# EAGLE board MovuinoHealthBandV0.2.7.4-2 (EAGLE 9.6.2)
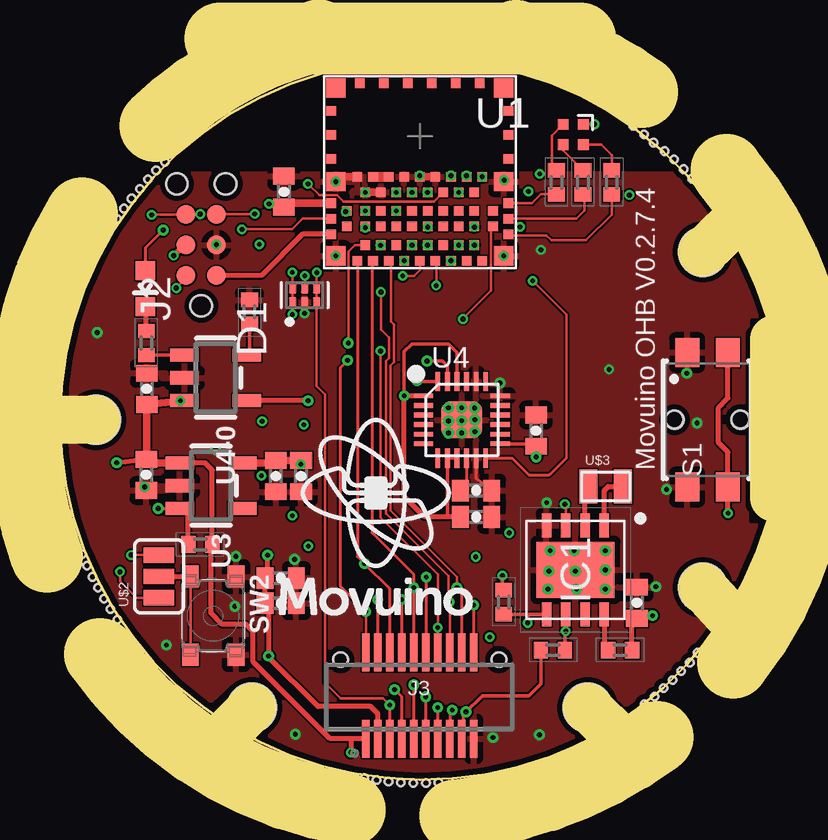
[diagram p0: board, top side]
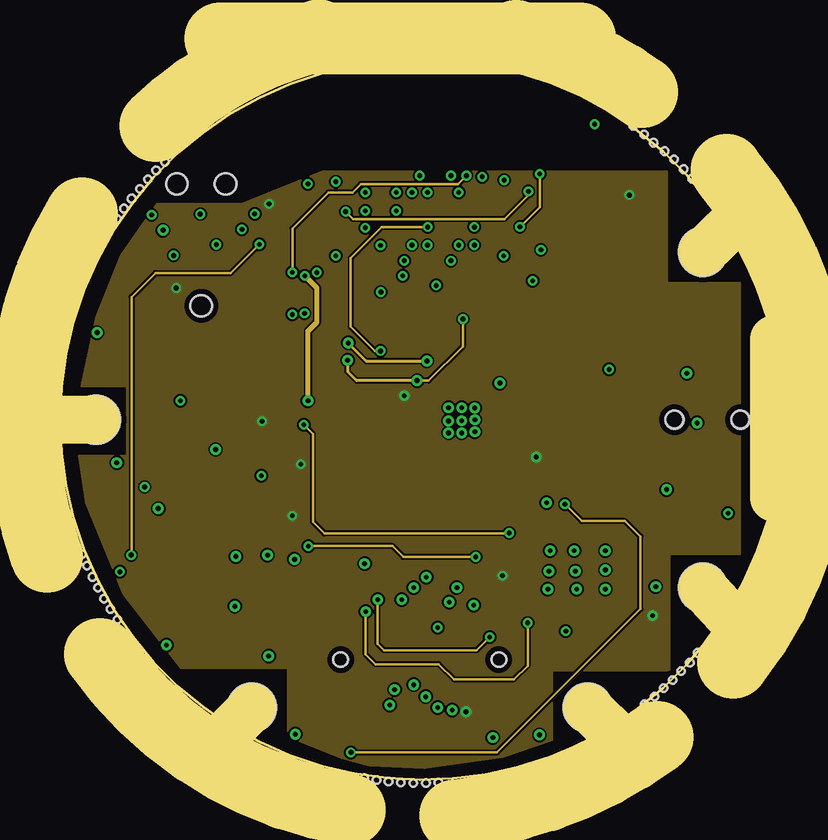
[diagram p1: board, inner layer VCC]
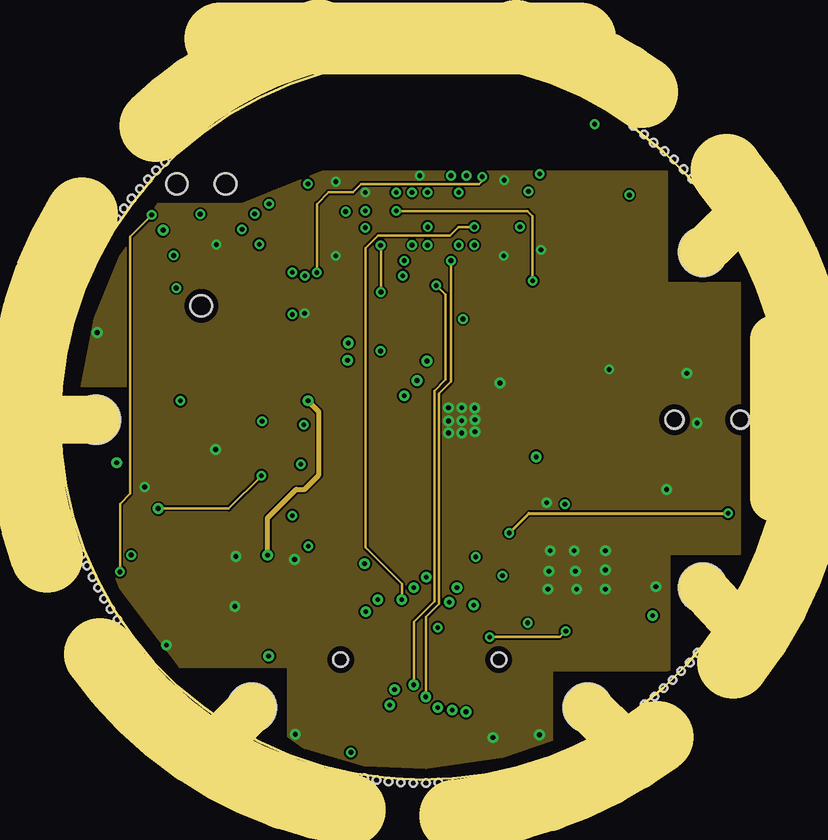
[diagram p2: board, inner layer GND]
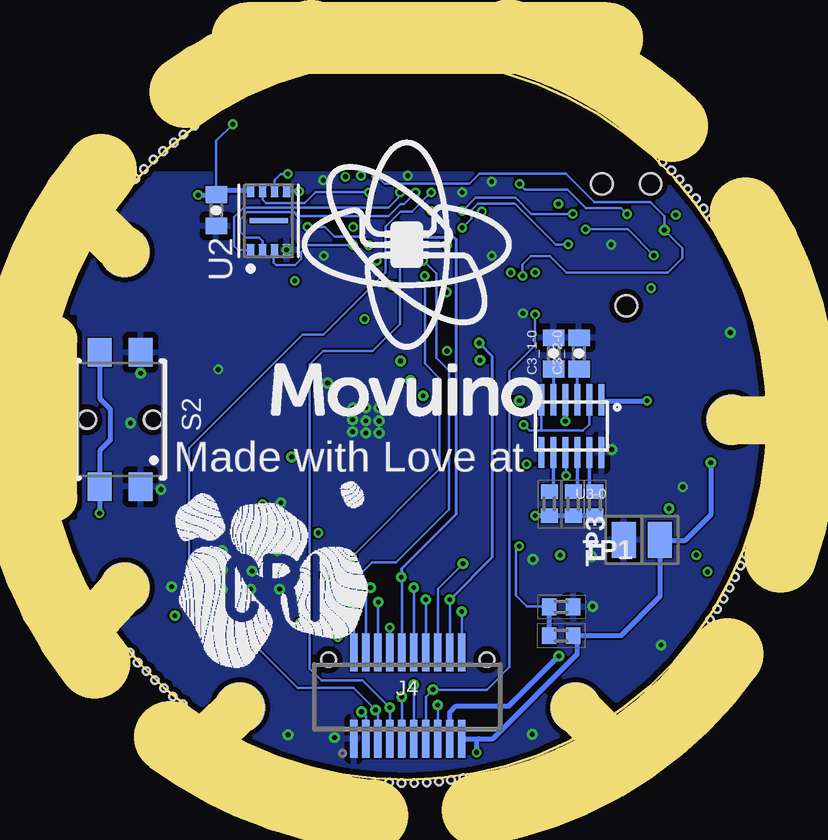
[diagram p3: board, bottom side, seen from below]

Size 29.5 x 30 mm. Coordinates in mm from the lower left corner, seen from the top.
Outline: 28.88,11.42 28.88,18.58 29.5,19.2 arc75 15,30 arc90 0,15 arc90 15,0 arc75 29.5,10.8 28.88,11.42
Copper layers (1*2*15*16): Top 0.035mm / dielectric 0.3mm / VCC 0.0175mm / dielectric 0.3mm / GND 0.0175mm / dielectric 0.3mm / Bottom 0.035mm
Design rules "PCBWAY_4layer_3mil-drill0.2-1mm": minimum track width 3mil, minimum drill 0.2mm, track to track 3mil, track to pad 3mil, pad to pad 3mil, via to via 3mil, smd to smd 0mil, copper to edge 10mil, drill to drill 8mil, minimum pad ring 6mil, minimum via ring 4mil, stop-mask expansion 4mil, vias tented up to drill 25mil, thermal gap 10mil
Net classes: 1 pcbway_3mil: width 0.076 mm, drill 0.15 mm, clearance 0.076 mm; 2 pcbway_cheap: width 0.152 mm, drill 0.3 mm, clearance 0.152 mm; 3 pcbway_5mil: width 0.127 mm, drill 0.25 mm, clearance 0.127 mm; 4 pcbway_4mil: width 0.102 mm, drill 0.2 mm, clearance 0.102 mm; 5 EC-Class7-drill0.15: width 0.125 mm, drill 0.15 mm, clearance 0.125 mm; 6 JLCPCB: width 0.127 mm, drill 0.2 mm, clearance 0.127 mm
Holes 2 mm at 1.5,15 26.8,22 26.8,8 8,3 22,3
Holes 0.3 mm at 23.9,27.25 24.35,26.9 24.75,26.55 25.2,26.2 25.6,25.85 26,25.45 26.35,25.05 12.69,0.07 13.2,-0.02 13.7,-0.08 14.21,-0.12 14.73,-0.14 15.26,-0.14 15.78,-0.12 0.92,9.4 1.13,8.91 1.35,8.45 1.59,8 1.83,7.55 2.11,7.1 2.39,6.66 2.38,23.37 2.67,23.8 2.99,24.22 3.34,24.63 3.66,25.02 4.01,25.39 4.37,25.76 24.37,3.14 24.79,3.46 25.16,3.81 25.54,4.15 25.9,4.52 26.26,4.88 26.59,5.28
tRestrict: area 28.8,11.8 to 30.6,19.2; area 28.8,10.8 to 30.5,18.1; area 4.1,25.4 to 26.6,31.1; 3 lines
bRestrict: area 28.9,10.9 to 30.6,19.3; area 4.1,25.4 to 28.3,31.1; 3 lines
Milling: 13 lines

## Footprints (pad centres in the part's own frame; a part is rotated, then mirrored left to right if it is on the bottom)
0402-CAP = smd 0.7 x 0.9: 1 -0.65,0; 2 0.65,0
SOT-886 = smd 0.42 x 0.31: 1 -0.29,0.5; 2 -0.29,0; 3 -0.29,-0.5; 4 0.29,-0.5; 5 0.29,0; 6 0.29,0.5
SON80P400X400X100-9N = smd 1 x 0.4: 1 -1.85,1.2; 2 -1.85,0.4; 3 -1.85,-0.4; 4 -1.85,-1.2; 5 1.85,-1.2; 6 1.85,-0.4; 7 1.85,0.4; 8 1.85,1.2 | smd 2.35 x 3.25: 9 0,0
TC2030-MCP-NL = smd 0.787 x 0.787: 1 1.27,-0.635; 2 1.27,0.635; 3 2.54,-0.635; 4 2.54,0.635; 5 3.81,-0.635; 6 3.81,0.635 | hole 0.889: 0,0; 5.08,-1.016; 5.08,1.016
DF12-20-DS-NO_MF = smd 0.3 x 1.6: 1 -2.25,-1.8; 2 -2.25,1.8; 3 -1.75,-1.8; 4 -1.75,1.8; 5 -1.25,-1.8; 6 -1.25,1.8; 7 -0.75,-1.8; 8 -0.75,1.8; 9 -0.25,-1.8; 10 -0.25,1.8; 11 0.25,-1.8; 12 0.25,1.8; 13 0.75,-1.8; 14 0.75,1.8; 15 1.25,-1.8; 16 1.25,1.8; 17 1.75,-1.8; 18 1.75,1.8; 19 2.25,-1.8; 20 2.25,1.8 | hole 0.6: -3.3,1.5; 3.3,1.5
DF12-20-DP-NL-(5.0) = smd 0.3 x 1.6: 1 -2.25,-1.8; 2 -2.25,1.8; 3 -1.75,-1.8; 4 -1.75,1.8; 5 -1.25,-1.8; 6 -1.25,1.8; 7 -0.75,-1.8; 8 -0.75,1.8; 9 -0.25,-1.8; 10 -0.25,1.8; 11 0.25,-1.8; 12 0.25,1.8; 13 0.75,-1.8; 14 0.75,1.8; 15 1.25,-1.8; 16 1.25,1.8; 17 1.75,-1.8; 18 1.75,1.8; 19 2.25,-1.8; 20 2.25,1.8 | hole 0.6: -3.3,1.5; 3.3,1.5
LED-0603 = smd 0.8 x 0.8: A 0,-0.75; C 0,0.75
R0402-SMALL-TDOCU = smd 0.6 x 0.7: 1 -0.5,0; 2 0.5,0
4363X10458XX = smd 1.2 x 1: 1 2.8,0.85; 2 2.8,-0.85; 3 -2.8,0.85; 4 -2.8,-0.85 | hole 0.75: 0,1.375; 0,-1.375
BTN_KMT0 = smd 0.95 x 0.7: A -1.625,0.95; A' 1.625,0.95; B -1.625,-0.95; B' 1.625,-0.95
PAD-1X1.5_NOSILK = smd 1 x 1.5: P$1 0,0
ISP1807-LR = smd 0.8 x 0.8: 1 3.5,-5; 7 3.5,-1.9; 25 -3.5,-1.9; 31 -3.5,-5; 68 3.5,2; 75 -3.5,2 | smd 0.4 x 0.4: 2 3.7,-4.1; 3 3.05,-3.775; 4 3.7,-3.45; 5 3.05,-3.125; 6 3.7,-2.8; 8 2.6,-1.7; 9 2.275,-2.35; 10 1.95,-1.7; 11 1.625,-2.35; 12 1.3,-1.7; 13 0.975,-2.35; 14 0.65,-1.7; 15 0.325,-2.35; 16 0,-1.7; 17 -0.325,-2.35; 18 -0.65,-1.7; 19 -0.975,-2.35; 20 -1.3,-1.7; 21 -1.625,-2.35; 22 -1.95,-1.7; 23 -2.275,-2.35; 24 -2.6,-1.7; 26 -3.7,-2.8; 27 -3.05,-3.125; 28 -3.7,-3.45; 29 -3.05,-3.775; 30 -3.7,-4.1; 32 -2.6,-5.2; 33 -2.275,-4.55; 34 -1.95,-5.2; 35 -1.625,-4.55; 36 -1.3,-5.2; 37 -0.975,-4.55; 38 -0.65,-5.2; 39 -0.325,-4.55; 40 0,-5.2; 41 0.325,-4.55; 42 0.65,-5.2; 43 0.975,-4.55; 44 1.3,-5.2; 45 1.625,-4.55; 46 1.95,-5.2; 47 2.275,-4.55; 48 2.6,-5.2; 49 -2.275,-3.775; 50 -1.625,-3.775; 51 -0.975,-3.775; 52 -0.325,-3.775; 53 0.325,-3.775; 54 0.975,-3.775; 55 1.625,-3.775; 56 2.275,-3.775; 57 -2.275,-3.125; 58 -1.625,-3.125; 59 -0.975,-3.125; 60 -0.325,-3.125; 61 0.325,-3.125; 62 0.975,-3.125; 63 1.625,-3.125; 64 2.275,-3.125; 65 3.7,-0.95; 66 3.7,0.05; 67 3.7,1.05; 69 2.5,2.2; 70 1.5,2.2; 71 0.5,2.2; 72 -0.5,2.2; 73 -1.5,2.2; 74 -2.5,2.2; 76 -3.7,1.05; 77 -3.7,0.05; 78 -3.7,-0.95
USON8-2X3 = smd 0.49 x 0.35: 1 -1.22,0.75; 2 -1.22,0.25; 3 -1.22,-0.25; 4 -1.22,-0.75; 5 1.22,-0.75; 6 1.22,-0.25; 7 1.22,0.25; 8 1.22,0.75 | smd 0.2 x 1.6: 9 0,0
SOT23-5 = smd 0.55 x 1.2: 1 -0.95,-1.3; 2 0,-1.3; 3 0.95,-1.3; 4 0.95,1.3; 5 -0.95,1.3
TDFN12 = smd 0.25 x 1.3: 1 -1.25,-1.1; 2 -0.75,-1.1; 3 -0.25,-1.1; 4 0.25,-1.1; 5 0.75,-1.1; 6 1.25,-1.1; 7 1.25,1.1; 8 0.75,1.1; 9 0.25,1.1; 10 -0.25,1.1; 11 -0.75,1.1; 12 -1.25,1.1
LEAD-QFN24-OLD = smd 0.8 x 0.2: 1 -1.6,1; 2 -1.6,0.6; 3 -1.6,0.2; 4 -1.6,-0.2; 5 -1.6,-0.6; 6 -1.6,-1; 13 1.6,-1; 14 1.6,-0.6; 15 1.6,-0.2; 16 1.6,0.2; 17 1.6,0.6; 18 1.6,1 | smd 0.2 x 0.8: 7 -1,-1.6; 8 -0.6,-1.6; 9 -0.2,-1.6; 10 0.2,-1.6; 11 0.6,-1.6; 12 1,-1.6; 19 1,1.6; 20 0.6,1.6; 21 0.2,1.6; 22 -0.2,1.6; 23 -0.6,1.6; 24 -1,1.6 | smd 1.7 x 1.54: 25 0,0
SJ_3 = smd 0.635 x 1.27: 1 -0.889,0; 2 0,0; 3 0.889,0
CRYSTAL-SMD-2X1.2-ABS06 = smd 0.75 x 1.4: P$1 -0.725,0; P$2 0.725,0
LRTB_R48G = smd 0.45 x 0.45: 1 0.425,0.425; 2 0.425,-0.425; 3 -0.425,-0.425; 4 -0.425,0.425

## Placement (x,y rotation side)
C2_1  10uF  [0402-CAP]  3.6,12.7 270 top
C2_2  10uF  [0402-CAP]  9,12.65 270 top
C2_3  0.1uF  [0402-CAP]  10.05,12.65 270 top
C2_4  10uF  [0402-CAP]  9.2,7.35 0 top
C2_5  1uF  [0402-CAP]  9.2,8.4 0 top
C3_1-0  470nF  [0402-CAP]  8.92,17.77 90 bottom
C3_2-0  1uF  [0402-CAP]  7.86,17.77 90 bottom
C4_1  10uF  [0402-CAP]  3.62,16.29 270 top
C6_1  0.1uF  [0402-CAP]  9.34,24.51 90 top
C6_5  10uF  [0402-CAP]  22.98,23.73 90 bottom
C8_1  10uF  [0402-CAP]  24.05,7.37 90 top
C8_5  0.01uF  [0402-CAP]  17.35,10.95 0 top
C8_6  0.1uF  [0402-CAP]  19.85,14.55 90 top
C8_7  0.1uF  [0402-CAP]  17.35,12.05 0 top
D1  PRTR5V0U2X,215PRTR5V0U2F  [SOT-886]  10.2,20.19 90 top
IC1  PCF8523TK_1,118  [SON80P400X400X100-9N]  21.49,8.74 270 top
J2  [TC2030-MCP-NL]  5.89,19.75 90 top
J3  DF12-20RECEPTACLE_NO-MF  [DF12-20-DS-NO_MF]  15,3.5 0 top
J4  DF12-20HEADER-5MM_NO-MF  [DF12-20-DP-NL-(5.0)]  15,3.5 0 bottom
LED4_1-0  Power  [LED-0603]  3.56,20.47 180 top
R0001  100kR  [R0402-SMALL-TDOCU]  8.6,6 0 bottom
R0002  120R  [R0402-SMALL-TDOCU]  23,24.9 90 top
R2_3  100kR  [R0402-SMALL-TDOCU]  5.85,9.8 0 top
R0003  68  [R0402-SMALL-TDOCU]  21.8,24.9 90 top
R0004  68  [R0402-SMALL-TDOCU]  20.7,24.9 90 top
R4_1-0  5KR  [R0402-SMALL-TDOCU]  7.9,19.5 270 top
R4_2-0  120R  [R0402-SMALL-TDOCU]  3.6,18.2 90 top
R0005  100KR  [R0402-SMALL-TDOCU]  8.6,7.2 180 bottom
R0006  10kR  [R0402-SMALL-TDOCU]  9.1,11.5 270 bottom
R0007  10kR  [R0402-SMALL-TDOCU]  7.2,11.5 270 bottom
R0008  10kR  [R0402-SMALL-TDOCU]  8.1,11.5 270 bottom
R0009  10kR  [R0402-SMALL-TDOCU]  18.5,7.4 90 top
R0010  10kR  [R0402-SMALL-TDOCU]  20.55,5.4 180 top
R0011  1kR  [R0402-SMALL-TDOCU]  23.35,5.4 180 top
S1  [4363X10458XX]  27,15 90 top
S2  [4363X10458XX]  26.99,15.01 270 bottom
SW2  [BTN_KMT0]  6.39,6.83 270 top
TP1  [PAD-1X1.5_NOSILK]  4.5,10 180 bottom
TP3  [PAD-1X1.5_NOSILK]  6,10 180 bottom
U1  ISP1807-LRISP1807-LR_ISP1807-LR  [ISP1807-LR]  15,26.83 0 top
U2  GD25Q16CEIGR  [USON8-2X3]  20.8,23.3 90 bottom
U3  AP2112K-3.3TRG13.3V  [SOT23-5]  6.3,12.25 270 top
U3-0  STM6601  [TDFN12]  8.18,14.73 180 bottom
U4  [LEAD-QFN24-OLD]  16.75,15 0 top
U4-0  MCP73831  [SOT23-5]  6.49,16.75 270 top
U$2  0402-JUMPER3  [SJ_3]  4.13,8.47 90 top
U$3  32.768khz  [CRYSTAL-SMD-2X1.2-ABS06]  22.75,12.22 0 top
U$5  LRTB_R48G  [LRTB_R48G]  21.4,26.89 0 top
U$7  LOGO_MOVUINOTOP  [LOGO_MOVUINO_BMP_10MM]  13.1,11.95 0 top
U$8  LOGO_MOVUINOBOTTOM_11MM  [LOGO_MOVUINO_BMP_11MM-BOTTOM]  15,22.28 0 top
U$9  LOGO-CRI-NEW-110MM-BOTTOM-SILK  [LOGO_CRI-NEW-BMP10MM-BOTTOM]  20.5,8.19 0 top

## Library data of the parts
C2_1 C2_2 C2_4 C4_1 C6_5 C8_1 = movuino; DIELECTRIC: MLCC, X5R; MF: Kemet; MPN: C0402C106M9PACTU; OC_MOUSER: 80-C0402C106M9P; TOLERANCE: 20%; VOLTAGE: 6.3V
C2_3 C6_1 C8_6 C8_7 = movuino; DIELECTRIC: MLCC, X5R; MF: Murata Electronics; MPN: GRM155R61C104KA88D; OC_MOUSER: 81-GRM155R61C104KA8D; OC_RS: 7235200; TOLERANCE: 10%; VOLTAGE: 16V
C2_5 C3_1-0 C3_2-0 = movuino; DIELECTRIC: MLCC, X5R; MF: Murata Electronics; MPN: GRM155R61A105KE15D; OC_MOUSER: 81-GRM155R61A105KE15; OC_RS: 7235199; TOLERANCE: 10%; VOLTAGE: 10V
C8_5 = movuino; DIELECTRIC: MLCC, X7R; MF: Murata Electronics; MPN: GRM155R71H103KA88D; OC_MOUSER: 81-GRM155R71H103KA8D; OC_RS: 7235278; TOLERANCE: 10%; VOLTAGE: 50V
D1 = movuino; MPN: PRTR5V0U2F
IC1 = movuino; DESCRIPTION: Real Time Clock Serial Clock/Calendar/Alarm/Timer/Battery Backup 8-Pin HVSON EP T/R; HEIGHT: 1mm; MANUFACTURER_NAME: NXP; MANUFACTURER_PART_NUMBER: PCF8523TK/1,118; MOUSER_PART_NUMBER: 771-PCF8523TK/1118; MOUSER_PRICE-STOCK: https://www.mouser.co.uk/ProductDetail/NXP-Semiconductors/PCF8523TK-1118/?qs=beN0Cyoe8Ym%252Bv1xGDkWHJQ%3D%3D
J2 J4 R0001 R0002 R2_3 R0003 R0004 R4_1-0 R4_2-0 R0005-R0009 R0010 R0011 SW2 TP1 TP3 U3 U3-0 U4 U$2 U$3 = movuino
J3 = movuino; DESCRIPTION: Receptacle without metal fitting and Boss 3.5 mm - 5mm; MPN: DF12A-20DS-0.5V(81)
LED4_1-0 = movuino; COLOUR: Red; FORWARD_INTENSITY: 25ma; FORWARD_VOLTAGE: 2.5V; LUMINOUS_INTENSITY: 180mcd; MF: OSRAM Opto Semiconductors; MPN: LS Q976-NR-1; OC_MOUSER: 720-LSQ976-NR-1; OC_RS: 6545420
S1 S2 = movuino; DATASHEET-URL: https://www.we-online.com/catalog/datasheet/436331045822.pdf; H: 1.65mm; OPERATION-FORCE: 220g; PART-NUMBER: 436331045822; QTY: 3300
U1 = movuino; BOI: QFN 8 x 8; BOI-METRIC: QFN 8 x 8; DESIG: BLE Module; FAB: Insight SiP; ISP_PART: ISP1807; REF: ISP1807-LR
U2 = movuino; DESCRIPTION: FLASH - NOR Memory IC 16Mb (2M x 8) SPI - Quad I/O 120MHz 8-USON (2x3); DIGI-KEY_PART_NUMBER: 1970-1011-1-ND; MF: GigaDevice Semiconductor (HK) Limited; MP: GD25Q16CEIGR; PACKAGE: XFDFN-8 GigaDevice Semiconductor (HK) Limited; PURCHASE-URL: https://pricing.snapeda.com/search/part/GD25Q16CEIGR/?ref=eda
U4-0 = movuino; MF: Microchip; MPN: MCP73831T-2ACI/OT; OC_MOUSER: 579-MCP73831T-2ACIOT; OC_RS: 7386360
U$5 = movuino; MF: Osram Opto Semiconductors; MPN: LRTBR48G; OC_MOUSER: 720-LRTBR48G; OC_RS: 8769299
U$7-U$9 = movuino_aestheticsV0

## Nets
3.3V [pcbway_3mil]: C2_2.1 C2_3.1 C6_1.1 C6_5.2 C8_1.1 C8_5.1 C8_6.1 J2.2 J3.17 J4.3 R0006.2 R0007.2 R0008.2 R0009.2 R0010.2 R0011.1 U1.26 U2.8 U3-0.4 U3.5 U4.1 U4.8 U4.9 U4.13 U4.22 U$5.1
!INT! [pcbway_3mil]: R0007.1 U3-0.11
!PB! [pcbway_3mil]: S1.2 S1.4 S2.2 S2.4 U3-0.2 U3-0.6
!PB!_OUT [pcbway_3mil]: R0006.1 U3-0.8
A0 [pcbway_3mil]: J3.9 J4.11 U1.42
A2 [pcbway_3mil]: J3.16 J4.6 U1.35
A3 [pcbway_3mil]: J3.18 J4.4 U1.36
A5 [pcbway_3mil]: J3.20 J4.2 U1.38
A7 [pcbway_3mil]: J3.11 J4.9 U1.44
B [pcbway_3mil]: R0004.2 U$5.4
BATT_MONITOR [pcbway_3mil]: R0001.1 R0005.2 U1.40
BLUE_LED [pcbway_3mil]: R0004.1 U1.6
CS_3.3V [pcbway_3mil]: J3.12 J4.10 U1.39
CSRD [pcbway_3mil]: C3_1-0.1 U3-0.5
D5 [pcbway_3mil]: U1.55
DFU [pcbway_3mil]: U1.49 U$2.3
EN [pcbway_3mil]: R2_3.1 U3-0.9 U3.3
G [pcbway_3mil]: R0003.2 U$5.3
GND [pcbway_3mil]: C2_1.2 C2_2.2 C2_3.2 C2_4.2 C2_5.2 C3_1-0.2 C3_2-0.2 C4_1.1 C6_1.2 C6_5.1 C8_1.2 C8_5.2 C8_6.2 C8_7.2 D1.2 IC1.4 IC1.9 J2.3 J3.19 J4.1 R4_1-0.1 R0005.1 S1.1 S1.3 S2.1 S2.3 SW2.A SW2.A' TP3.P$1 U1.1 U1.7 U1.14 U1.16 U1.18 U1.21 U1.23 U1.24 U1.25 U1.31 U2.4 U3-0.12 U3.2 U4-0.2 U4.11 U4.18 U4.20 U4.25
GREEN_LED [pcbway_3mil]: R0003.1 U1.4
INT_MPU [pcbway_3mil]: U1.59 U4.12
INT_PPG [pcbway_3mil]: J3.14 J4.8 U1.53
MISO_3.3V [pcbway_3mil]: J3.8 J4.14 U1.56
MOSI_3.3V [pcbway_3mil]: J3.6 J4.16 U1.32
N$2 [pcbway_3mil]: R4_2-0.1 U4-0.1
N$3: IC1.2 U$3.P$1
N$4 [pcbway_3mil]: U1.20 U1.22
N$6: IC1.1 U$3.P$2
N$7 [pcbway_3mil]: R0008.1 U3-0.10
N$8 [pcbway_3mil]: LED4_1-0.C R4_2-0.2
N$10 [pcbway_3mil]: R4_1-0.2 U4-0.5
N$11: IC1.8 R0011.2
N$28 [pcbway_3mil]: C8_7.1 U4.10
N$30 [pcbway_3mil]: U1.58
QSPI_CS [pcbway_3mil]: U1.15 U2.1
QSPI_DATA0 [pcbway_3mil]: U1.27 U2.5
QSPI_DATA1 [pcbway_3mil]: U1.17 U2.2
QSPI_DATA2 [pcbway_3mil]: U1.47 U2.3
QSPI_DATA3 [pcbway_3mil]: U1.11 U2.7
QSPI_SCK [pcbway_3mil]: U1.45 U2.6
R [pcbway_3mil]: R0002.2 U$5.2
RED_LED [pcbway_3mil]: R0002.1 U1.2
RESET [pcbway_3mil]: J2.6 U1.13 U$2.1
RXD [pcbway_3mil]: J3.15 J4.5 U1.19
SCK_3.3V [pcbway_3mil]: J3.10 J4.12 U1.34
SCL_3.3V [pcbway_3mil]: IC1.6 J3.4 J4.18 R0010.1 U1.33 U4.23
SDA_3.3V [pcbway_3mil]: IC1.5 J3.2 J4.20 R0009.1 U1.3 U4.24
SWDCLK [pcbway_3mil]: J2.1 U1.30
SWDIO [pcbway_3mil]: J2.4 U1.28
SWITCH [pcbway_3mil]: SW2.B SW2.B' U$2.2
SWO [pcbway_3mil]: J2.5 U1.57
TXD [pcbway_3mil]: J3.13 J4.7 U1.41
USB_D+ [pcbway_3mil]: D1.3 D1.4 J3.5 J4.15 U1.8
USB_D- [pcbway_3mil]: D1.1 D1.6 J3.7 J4.13 U1.10
VBATT [pcbway_3mil]: C2_1.1 C4_1.2 IC1.3 J3.1 J4.19 R0001.2 R2_3.2 TP1.P$1 U3-0.1 U3.1 U4-0.3
VBUS [pcbway_3mil]: C2_4.1 C2_5.1 D1.5 J3.3 J4.17 LED4_1-0.A U1.12 U4-0.4
VREF [pcbway_3mil]: C3_2-0.1 U3-0.3

## Tracks (layer width: path | path; a pad name or v marks a point on that pad's centre or on a via)
3.3V  (via drill 0.2, 0.2 pad 0.35, 0.2 pad 0.45)
  Top 0.102: U$5.1 v22.29,27.32 | J2.2 5.26,20.89 v4.85,20.49
  Top 0.127: J4.3 16.8,1.75 16.8,2.69 v16.93,2.82
  Top 0.152: U4.9 U4.8 16.15,10.96 16.16,10.95 | U4.22 16.55,17.8 16.19,18.16 14.67,18.16 14.35,17.84 v14.35,16 | U4.13 19.8,14 | R0009.2 18.45,7.95 v18.45,8.5 | R0010.2 20.05,4 19.55,3.5 17.61,3.5 v16.93,2.82
  Top 0.2: 19.8,14 C8_6.1 v19.85,13.45 | C8_5.1 16.16,10.95 15.2,10.95 14.35,11.8 v14.35,16 U4.1 | R0011.1 23.85,6.52 C8_1.1 24.16,6.83 v24.71,6.83
  Top 0.305: U3.5 8.95,13.2 C2_2.1 C2_3.1 v10.04,13.15 | U1.26 9.36,24.03 C6_1.1 v8.73,24.01 v8.72,24
  Bottom 0.102: v22.29,27.32 22.98,26.63 22.98,24.55 C6_5.2 | J4.3 16.75,2.64 v16.93,2.82
  Bottom 0.2: U3-0.4 v8.43,14.94 | U2.8 21.58,24.55 22.98,24.55 | R0007.2 R0008.2 R0006.2 v9.69,11 | v23.74,24.37 C6_5.2
  pour VCC: 10.95,25.35 25.3,25.35 25.3,20.7 28.35,20.7 28.35,20.2 28.35,9.4 25.4,9.4 25.4,4.55 20.5,4.55 20.5,1.65 18.45,0.95 15.2,0.5 12.9,0.6 11.75,0.9 9.5,1.8 9.5,4.65 5.05,4.65 2.65,7.75 1.1,11.55 0.8,13.5 2.8,13.5 2.8,16.4 0.9,16.4 1.5,19.25 2.55,21.85 4.05,24 7.6,24
!INT!
  Bottom 0.152: U3-0.11 7.43,12.23 R0007.1
!PB!  (via drill 0.2, 0.2 pad 0.35, 0.2 pad 0.4)
  Top 0.2: v27.85,11.1 S1.4 27.85,13.65 27.45,14.05 27.45,15.5 27.85,15.9 S1.2
  VCC 0.102: v10.17,14.79 10.55,14.41 10.55,10.74 11.03,10.26 18.73,10.26 v18.73,10.28
  GND 0.127: v27.85,11.1 19.55,11.1 v18.73,10.28
  Bottom 0.102: U3-0.2 7.43,14.81 7.69,14.55 9.45,14.55 | v10.17,14.79 9.93,14.55 9.45,14.55 | U3-0.6 9.43,14.57 9.45,14.55
  Bottom 0.2: S2.4 27.84,15.89 27.4,15.45 27.4,14.15 27.84,13.71 S2.2 S1.4 v27.85,11.1
!PB!_OUT
  Bottom 0.152: U3-0.8 8.93,12.17 R0006.1
A0  (via drill 0.2, 0.2 pad 0.45)
  Top 0.102: v15.69,20.6 15.69,21.59 U1.42
  Top 0.127: J4.11 v14.75,3.95
  GND 0.102: v14.75,3.95 14.75,6.57 15.61,7.43 15.61,16.2 16.08,16.67 16.08,20.21 v15.69,20.6
  Bottom 0.102: J4.11 v14.75,3.95
A2  (via drill 0.2, 0.2 pad 0.45)
  Top 0.102: U1.35 v13.37,22.27 | v13.38,20.32 13.38,18.77 13.72,18.43 13.72,17.57 13.59,17.44 13.59,11.1 16.2,8.49 16.2,7.43 v16.23,7.4 16.25,7.38 J4.6
  GND 0.102: v13.37,22.27 13.38,22.26 13.38,20.34 v13.38,20.32
  Bottom 0.102: J4.6 16.25,7.38 v16.23,7.4
A3  (via drill 0.2 pad 0.45)
  Top 0.102: U1.36 13.8,21.53 13.8,19.1 13.93,18.97 13.93,17.4 13.79,17.26 13.79,11.21 16.55,8.45 v16.55,8
  Top 0.127: J4.4 16.75,7.8 v16.55,8
  Bottom 0.102: J4.4 16.75,7.8 v16.55,8
A5  (via drill 0.2, 0.2 pad 0.45)
  Top 0.127: J4.2 v17.25,7.27
  Bottom 0.102: U1.38 13.81,21.09 13.81,17.58 13.29,17.06 13.29,11.27 15.5,9.06 16.49,9.06 17.25,8.3 v17.25,7.27 J4.2
  other vias: 14.35,21.63
A7  (via drill 0.2, 0.2 pad 0.45)
  Top 0.127: J4.9 v15.25,3.45
  GND 0.102: v15.25,3.45 15.25,6.78 15.8,7.33 15.8,16.09 16.3,16.59 U1.44
  Bottom 0.102: J4.9 v15.25,3.45
  other vias: 16.3,21.63
B
  Top 0.102: R0004.2 20.5,25.6 20.5,26.84 U$5.4
BATT_MONITOR  (via drill 0.2, 0.2 pad 0.35)
  Top 0.102: U1.40 15,21.23 14.77,21 v14.29,21
  VCC 0.102: v17.33,9.28 14.32,9.28 13.87,9.73 v10.35,9.73
  Bottom 0.102: v10.35,9.73 10.48,9.6 10.48,7.67 10.03,7.22 9.12,7.22 R0005.2 | v14.29,21 14.29,17.34 13.67,16.72 13.67,12.95 v17.33,9.29 v17.33,9.28
  Bottom 0.203: R0001.1 R0005.2
BLUE_LED
  Top 0.102: R0004.1 20.05,24.4 19.68,24.03 U1.6
CS_3.3V  (via drill 0.2, 0.2 pad 0.45)
  Top 0.127: v15.27,8.44 15.27,5.32 J4.10
  Bottom 0.102: J4.10 15.25,8.42 v15.27,8.44
  Bottom 0.127: v15.27,8.44 15.27,8.78 13,11.05 13,22.53 13.08,22.61 14.35,22.61 U1.39
  other vias: 14.68,22.28
CSRD
  Bottom 0.127: C3_1-0.1 U3-0.5
DFU  (via drill 0.2, 0.2 pad 0.35)
  Top 0.102: v2.97,9.36 3.01,9.39 3.04,9.36 U$2.3 | U1.49 v12.72,23.01
  VCC 0.102: v2.97,9.36 v2.98,9.37 2.98,20.12 3.98,21.12 7.12,21.12 v8.31,22.31
  Bottom 0.102: v12.72,23.01 12.34,23.39 12.34,23.74 12.07,24.01 10.53,24.01 8.83,22.31 v8.31,22.31
EN  (via drill 0.2 pad 0.35, 0.2 pad 0.45)
  Top 0.127: v4.1,11.3 4.95,11.3 5,11.25
  Top 0.152: U3.3 5,11.25
  Top 0.2: 5,11.25 5.1,11.35 5.35,11.1 R2_3.1
  GND 0.102: v8.4,12.66 7.03,11.3 v4.1,11.3
  Bottom 0.102: U3-0.9 8.4,13.6 v8.4,12.66
G
  Top 0.102: R0003.2 20.97,26.23 U$5.3
  Top 0.127: U$5.3
GND  (via drill 0.2, 0.2 pad 0.35, 0.2 pad 0.4, 0.2 pad 0.45)
  Top 0.127: U4.11 17.35,12.55 C8_7.2
  Top 0.305: v15,25.18 U1.16 U1.14 | U1.24 11.7,25.13 U1.25 | U1.23 U1.21
  other vias: 18.05,1.75 16.2,15.5 16.75,15.5 17.3,15 16.2,14.95 16.2,14.45 16.75,14.45 18.34,16.53 3.53,12.2 7.29,7.22 9.78,9.18 1.55,18.63 26.56,14.87 7.33,9.3 4.44,5.6 9.81,1.89 19.99,1.86 12.72,24.48 11.5,24.93 6.52,22.3 18.5,21.83 11.5,21.83 18.52,24.99 10.2,19.44 6.49,13.76 16.75,14.96 17.29,15.49 17.3,14.5 20.05,22.08 22.9,17.1 25.29,12.09 26.14,16.94 24.84,8.04 22.74,9.54 22.74,8.74 22.74,7.94 21.54,7.94 21.49,8.69 21.44,9.54 20.44,9.54 20.39,8.69 20.34,7.94 20.29,11.54
  pour Top: 0.24,15.01 arc-90 15.04,29.81 arc-90 29.84,15.01 arc-90 15.04,0.21 arc-90
  pour Bottom: 0.21,15.04 arc-90 15.01,29.84 arc-90 29.81,15.04 arc-90 15.01,0.24 arc-90
  pour GND: 10.95,25.35 25.3,25.35 25.3,20.95 25.3,20.7 28.35,20.7 28.35,18.45 28.35,9.4 25.85,9.4 25.4,9.4 25.4,7.35 25.4,4.55 21.45,4.55 20.5,4.55 20.5,1.65 18.45,0.95 15.25,0.5 12.7,0.6 10.15,1.35 9.5,1.8 9.5,4.7 5,4.7 2.5,8 1.15,11.5 0.85,13.15 0.85,13.5 2.2,13.5 2.8,13.5 2.8,16.2 2.8,16.4 0.9,16.4 1.45,19.2 2.5,21.8 4.1,24 7.6,24
GREEN_LED
  Top 0.102: U1.4 21.53,23.38 21.86,23.71 21.86,24.34 R0003.1
INT_MPU  (via drill 0.2)
  Top 0.102: v19.71,20.79 21.11,19.39 21.11,13.4
  Top 0.127: 21.11,13.4 20.4,12.7 19.55,12.7 18.85,13.4 U4.12
  GND 0.102: U1.59 19.5,23.7 19.7,23.5 v19.7,20.8 v19.71,20.79
  other vias: 14.03,23.71
INT_PPG  (via drill 0.2, 0.2 pad 0.4)
  Top 0.102: v15.75,6.33 15.75,8.55 13.37,10.93 v13.37,17.87 | U1.53 v15.34,23.05 v15.34,23.04
  Top 0.127: J4.8 v15.75,6.33
  VCC 0.102: v15.34,23.04 13.41,23.04 12.12,21.74 12.12,18.89 13.14,17.87 v13.37,17.87
  Bottom 0.102: J4.8 v15.75,6.33
MISO_3.3V  (via drill 0.2 pad 0.4, 0.2 pad 0.45)
  Top 0.102: U1.56 v17.27,23.04
  Top 0.127: J4.14 v14.25,7.5
  GND 0.102: v17.27,23.04 16.61,23.04 16.26,22.68 13.27,22.68 12.74,22.15 12.74,9.67 14.25,8.16 v14.25,7.5
  Bottom 0.102: J4.14 v14.25,7.5
MOSI_3.3V  (via drill 0.2 pad 0.45)
  Top 0.127: J4.16 13.75,7.95 v12.7,9 12.4,9.3 U1.32
  Bottom 0.102: J4.16 13.75,7.95 v12.7,9
N$2
  Top 0.152: U4-0.1 R4_2-0.1
N$3
  Top 0.2: IC1.2 21.89,12.09 U$3.P$1
N$4
  Top 0.406: U1.22 U1.20
N$6
  Top 0.2: IC1.1 22.69,12.05 22.86,12.22 U$3.P$2
N$7
  Bottom 0.152: U3-0.10 7.93,12.17 R0008.1
N$8
  Top 0.2: R4_2-0.2 3.6,19.68 LED4_1-0.C
N$10
  Top 0.152: R4_1-0.2 7.9,17.81 U4-0.5
N$11
  Top 0.2: IC1.8 22.69,5.56 R0011.2
N$28
  Top 0.127: U4.10 16.95,12.15
  Top 0.2: 16.95,12.15 C8_7.1
QSPI_CS  (via drill 0.2)
  Bottom 0.102: U1.15 15.32,24.32 15.8,23.85 21.85,23.85 22.25,23.45 22.25,22.25 22.08,22.08 U2.1
  other vias: 15.32,24.48
QSPI_DATA0  (via drill 0.2)
  Top 0.152: U1.27 v11.92,23.68 v11.91,23.68
  VCC 0.102: v19.53,24.52 19.51,24.5 19.51,24.35 18.53,23.37 12.21,23.37 v11.91,23.68
  Bottom 0.102: U2.5 v19.53,24.52
QSPI_DATA1  (via drill 0.2)
  Bottom 0.102: U1.17 15.15,24 15.3,24 15.8,23.5 19.6,23.5 19.75,23.65 21.7,23.65 22,23.35 22,22.85 21.75,22.6 21.2,22.6 21.05,22.45 U2.2
  other vias: 14.68,24.48
QSPI_DATA2  (via drill 0.2)
  Bottom 0.102: U1.47 18.03,22.28 19.17,22.28 19.45,22 19.45,21.7 19.7,21.45 20.5,21.45 20.6,21.55 20.6,22.03 U2.3
  other vias: 17.28,22.28
QSPI_DATA3  (via drill 0.2)
  Bottom 0.102: U1.11 18.84,24.48 19.29,24.03 20.9,24.03 21.05,24.18 U2.7
  other vias: 16.62,24.48
QSPI_SCK  (via drill 0.2, 0.2 pad 0.35)
  VCC 0.102: v20,25.25 20,23.86 v19.18,23.04
  Bottom 0.102: U1.45 16.98,22.64 18.05,22.64 18.45,23.04 v19.18,23.04 | U2.6 20.55,25 20.3,25.25 v20,25.25
  other vias: 16.62,22.28
R
  Top 0.102: U$5.2 22.57,26.46 23,26.03 R0002.2
RED_LED
  Top 0.102: U1.2 18.75,22.68 20.28,22.68 20.48,22.48 21.92,22.48 23,23.56 R0002.1
RESET  (via drill 0.2, 0.2 pad 0.35, 0.2 pad 0.4)
  Top 0.102: U1.13 15.59,24.09 11.82,24.09 11.55,24.36 10.81,24.36 v10.34,24.83 | U$2.1 3.19,7.58 2.5,8.27 v2.5,8.66 | v3.82,23.54 3.84,23.56 J2.6
  Top 0.127: J2.6 v5.84,23.56 v5.85,23.57
  GND 0.102: v2.5,8.66 2.5,11.5 2.92,11.92 2.92,22.64 v3.82,23.54
  Bottom 0.102: v5.85,23.57 6.11,23.83 7.58,23.83 8.35,24.6 10.11,24.6 v10.34,24.83
RXD  (via drill 0.2, 0.2 pad 0.45)
  Top 0.127: v16.35,2.9 16.25,2.8 J3.15
  Bottom 0.102: U1.19 14.82,23.68 15.3,23.68 15.93,23.05 15.93,21.14 18.51,18.56 19.38,18.56 24.11,13.83 24.11,8.33 19.6,3.82 17.27,3.82 v16.35,2.9 16.25,2.8 J3.15
  other vias: 14.03,24.48
SCK_3.3V  (via drill 0.2 pad 0.45)
  Top 0.127: J4.12 v14.75,8 14.75,8.55 13,10.3 13,21.58 U1.34
  Bottom 0.102: J4.12 v14.75,8
SCL_3.3V  (via drill 0.2 pad 0.35, 0.2 pad 0.4, 0.2 pad 0.45)
  Top 0.102: U1.33 12.3,22.28 12.03,22.01 v12.03,18.21 v12.02,18.2 | IC1.6 v21.09,6.19
  Top 0.127: J4.18 v13.25,7.5
  Top 0.152: v15.3,17.45 15.94,17.45 16.15,17.24 U4.23 | IC1.6 21.05,6.85 R0010.1
  VCC 0.102: v17.92,5.94 17.37,5.39 13.5,5.39 13.24,5.65 v13.24,7.49 v13.25,7.5
  VCC 0.127: v12.02,18.2 12.77,17.45 v15.3,17.45
  GND 0.102: v17.92,5.94 20.84,5.94 v21.09,6.19
  Bottom 0.102: J4.18 v13.25,7.5
  Bottom 0.127: v13.25,7.5 11.47,9.28 11.47,17.64 v12.02,18.19 v12.02,18.2
SDA_3.3V  (via drill 0.2, 0.2 pad 0.4, 0.2 pad 0.45)
  Top 0.102: U1.3 17.97,22.98 17.97,20.39 16.8,19.22 v16.8,19.2 | v12.75,7 J4.20
  Top 0.127: v12.75,7 11.68,8.07 11.68,17.16 v12,17.48
  Top 0.152: U4.24 14.92,16.6 v14.89,16.63 | IC1.5 19.5,6.89 | 19.5,6.89 R0009.1 | 19.5,6.89 v19.5,6.53
  VCC 0.102: v16.8,19.2 16.8,18.06 15.37,16.63 14.74,16.63 | v12.75,7 v12.74,6.99 12.74,5.22 13.15,4.81 15.79,4.81 16.42,4.18 18.93,4.18 19.5,4.75 v19.5,6.53
  VCC 0.127: v12,17.48 12,17 12.37,16.63 14.74,16.63 v14.89,16.63
  Bottom 0.102: J4.20 v12.75,7
SWDCLK
  Top 0.203: U1.30 10.11,22.73 8.4,21.02 J2.1
SWDIO  (via drill 0.2, 0.2 pad 0.4)
  Top 0.102: U1.28 10.12,23.38 9.68,22.94 v7.59,22.94
  Top 0.203: v4.74,21.85 5.18,22.29 J2.4
  Bottom 0.102: v7.59,22.94 5.83,22.94 v4.74,21.85
SWITCH
  Top 0.102: SW2.B' 5.44,8.3
  Top 0.2: U$2.2 5.43,8.47 SW2.B
  Top 0.203: SW2.B 5.29,8.46 5.44,8.3
SWO  (via drill 0.2)
  Top 0.102: v8.12,23.58 6.54,23.58 J2.5
  Bottom 0.102: U1.57 12.17,24.26 10.52,24.26 9.84,23.58 v8.12,23.58
  other vias: 12.72,23.71
TXD  (via drill 0.2, 0.2 pad 0.45)
  Top 0.127: J3.13 v15.75,3
  Bottom 0.102: U1.41 15.32,19 16.46,17.86 18.53,17.86 19.09,17.3 19.09,4.62 18.6,4.13 16.88,4.13 v15.75,3 J3.13
  other vias: 15.32,22.28
USB_D+  (via drill 0.2, 0.2 pad 0.45)
  Top 0.102: v10.71,21.14 v10.7,21.13 D1.4 D1.3 10.7,16.4 11.05,16.05 11.05,4.04 11.7,3.39 13.46,3.39 v13.75,3.1
  Top 0.127: J4.15 v13.75,3.1
  GND 0.102: U1.8 17.6,24.95 17.48,24.83 12.56,24.83 12.21,24.48 11.19,24.48 10.71,24 v10.71,21.14
  Bottom 0.102: J4.15 v13.75,3.1
  other vias: 17.6,25.13
USB_D-  (via drill 0.2, 0.2 pad 0.45)
  Top 0.102: v9.69,21.15 v9.7,21.14 D1.6 D1.1 v9.7,19.4 v9.69,19.39 | U1.10 v16.95,25.18
  Top 0.127: J4.13 14.25,3.45 v13.95,3.75
  VCC 0.102: v16.95,25.18 16.6,24.83 12.55,24.83 12.19,24.47 11.19,24.47 9.69,22.97 v9.69,21.15
  Bottom 0.102: v9.69,19.39 9.69,18.1 10.76,17.03 10.76,4.69 11.7,3.75 v13.95,3.75 14.25,3.45 J4.13
VBATT  (via drill 0.2 pad 0.35, 0.2 pad 0.4, 0.2 pad 0.45)
  Top 0.102: IC1.3 21.09,11.44 v21.05,11.48
  Top 0.2: R2_3.2 6.35,12.9 6.05,13.2 U3.1 | 12.17,1.7 12.13,1.66 v12.13,1.13
  Top 0.203: C2_1.1 v2.38,13.2 v2.37,13.21 | R2_3.2 6.3,9.75 6.3,6.94 6.77,6.47 7.76,6.47 8.06,6.17 8.06,4.91 11.27,1.7 12.17,1.7 J4.19
  Top 0.254: U4-0.3
  Top 0.305: 3.62,13.22 C4_1.2 v5.02,15.79 U4-0.3 | 3.62,13.22 C2_1.1 | U3.1 3.64,13.2 3.62,13.22
  VCC 0.102: v12.13,1.13 18.22,1.13 24.2,7.11 24.2,10.14 23.56,10.78 21.75,10.78 v21.05,11.48
  Bottom 0.2: U3-0.1 6.89,15.79 v5.02,15.79 | J4.19 12.05,1.7 | 12.05,1.7 11.45,1.7 11.35,1.8 | 12.05,1.7 12.13,1.62 v12.13,1.13
  Bottom 0.203: 11.35,1.8 7.94,5.21 7.94,5.84 R0001.2 6.11,6 4.48,7.63 4.48,9.95 | 4.48,9.95 4.48,9.98 TP1.P$1 | 4.48,9.95 3.45,9.95 2.37,11.03 v2.37,13.21
VBUS  (via drill 0.2, 0.2 pad 0.4, 0.2 pad 0.45)
  Top 0.102: v10.21,21 D1.5 | U1.12 v16.3,25.18
  Top 0.127: v4.3,22.9 3.56,22.16 LED4_1-0.A
  Top 0.2: v10.34,15.79 v10.33,15.8 U4-0.4
  Top 0.203: J4.17 13.25,2.75 12.95,3.05 10.75,3.05 8.7,5.1 v8.7,5.15 8.7,7.2 C2_4.1 C2_5.1 8.65,8.45 v8.65,9.35
  VCC 0.2: v10.34,15.79 10.34,18.7 10.71,19.07 10.71,20.5 v10.21,21
  GND 0.2: v8.65,9.35 8.65,10.9 9.85,12.1 10.2,12.1 10.8,12.7 10.8,15.33 v10.34,15.79
  Bottom 0.102: v16.3,25.18 15.97,24.85 12.42,24.85 12.01,25.26 8.41,25.26 7.22,24.07 4.89,24.07 4.3,23.48 v4.3,22.9 3.55,22.15 3.55,21.74 4.15,21.14 8.39,21.14 9.07,21.82 9.86,21.82 10.21,21.47 v10.21,21
  Bottom 0.2: J4.17 13.25,2.8 12.98,3.07 12.23,3.07
  Bottom 0.203: 12.23,3.07 10.78,3.07 v8.7,5.15
VREF
  Bottom 0.127: U3-0.3 7.93,17.05 C3_2-0.1

## Text on the board
tPlace: Movuino OHB V0.2.7.4 | Open Health Band V0.2.7.4
bPlace: Made with Love at